# Altium PCB FPv0.1.PcbDoc
Units mm, origin at the board's own origin, x right, y up, seen from the top; angles counter-clockwise.
Board outline 81.28 x 53.34 mm, 4 copper layers (Top Layer, GROUND PLANE, MidLayer1, Bottom Layer); 97 components, 156 nets, 584 pads, 165 vias.
Unrouted connection lines stored in the file: 247.
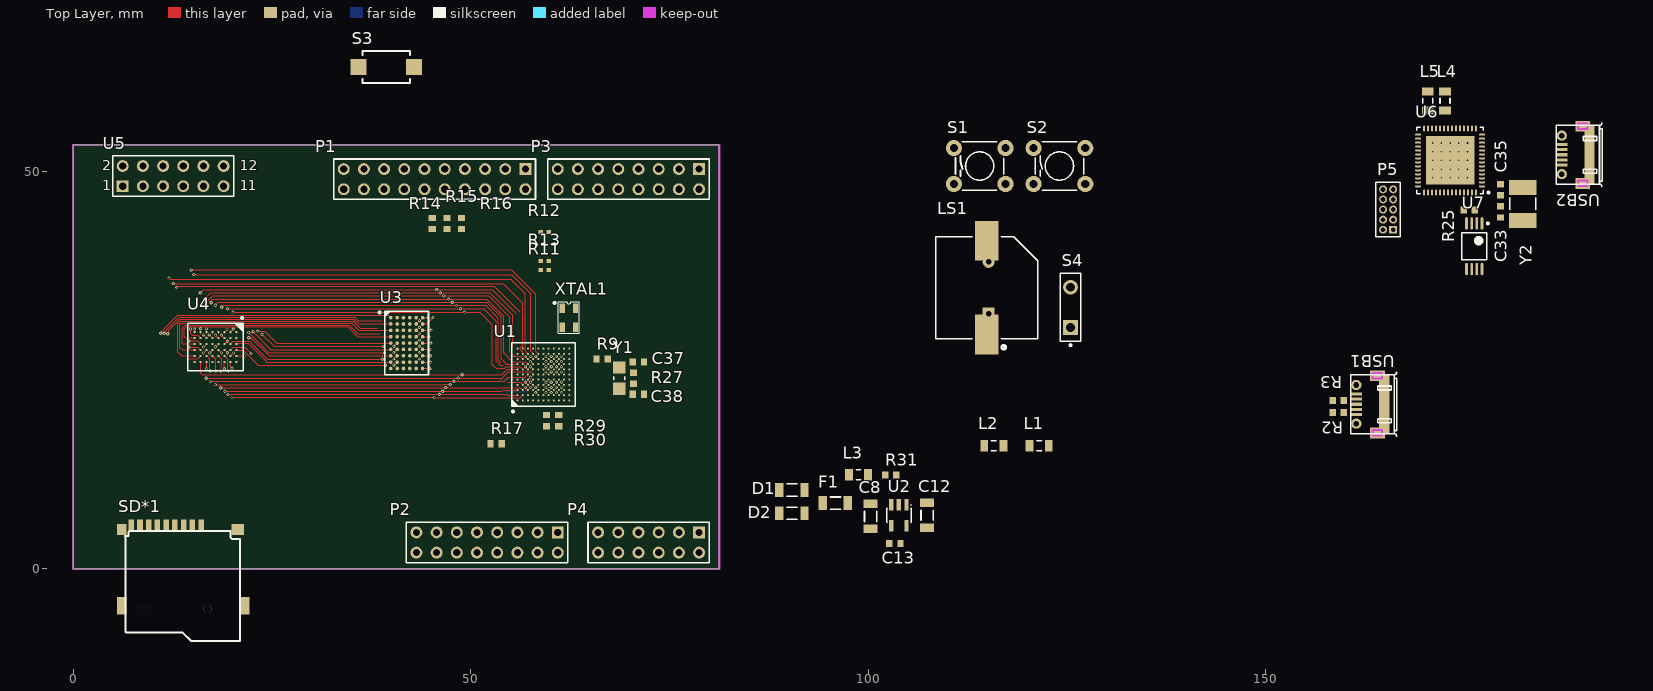
[diagram p0: Top Layer view]
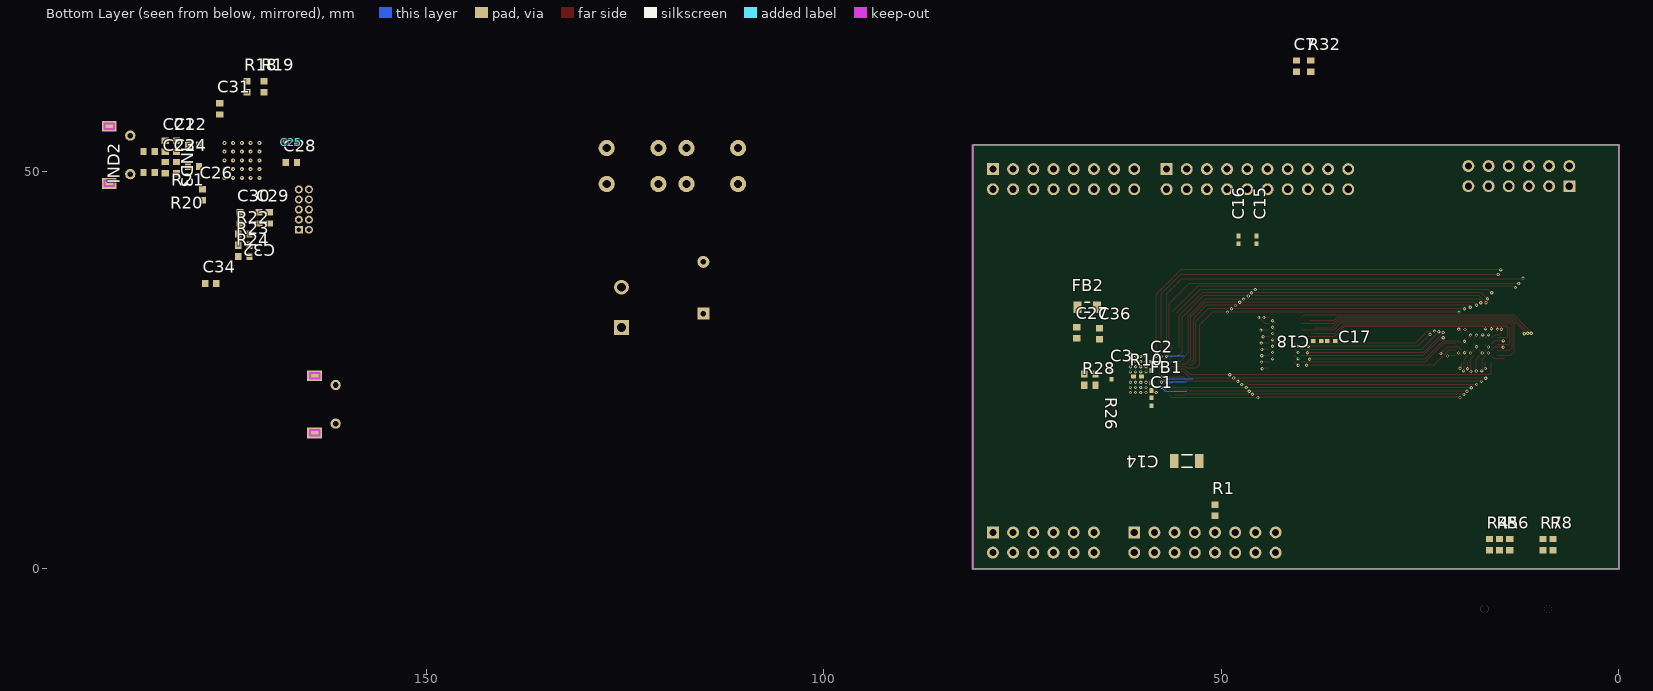
[diagram p1: Bottom Layer view, seen from below]
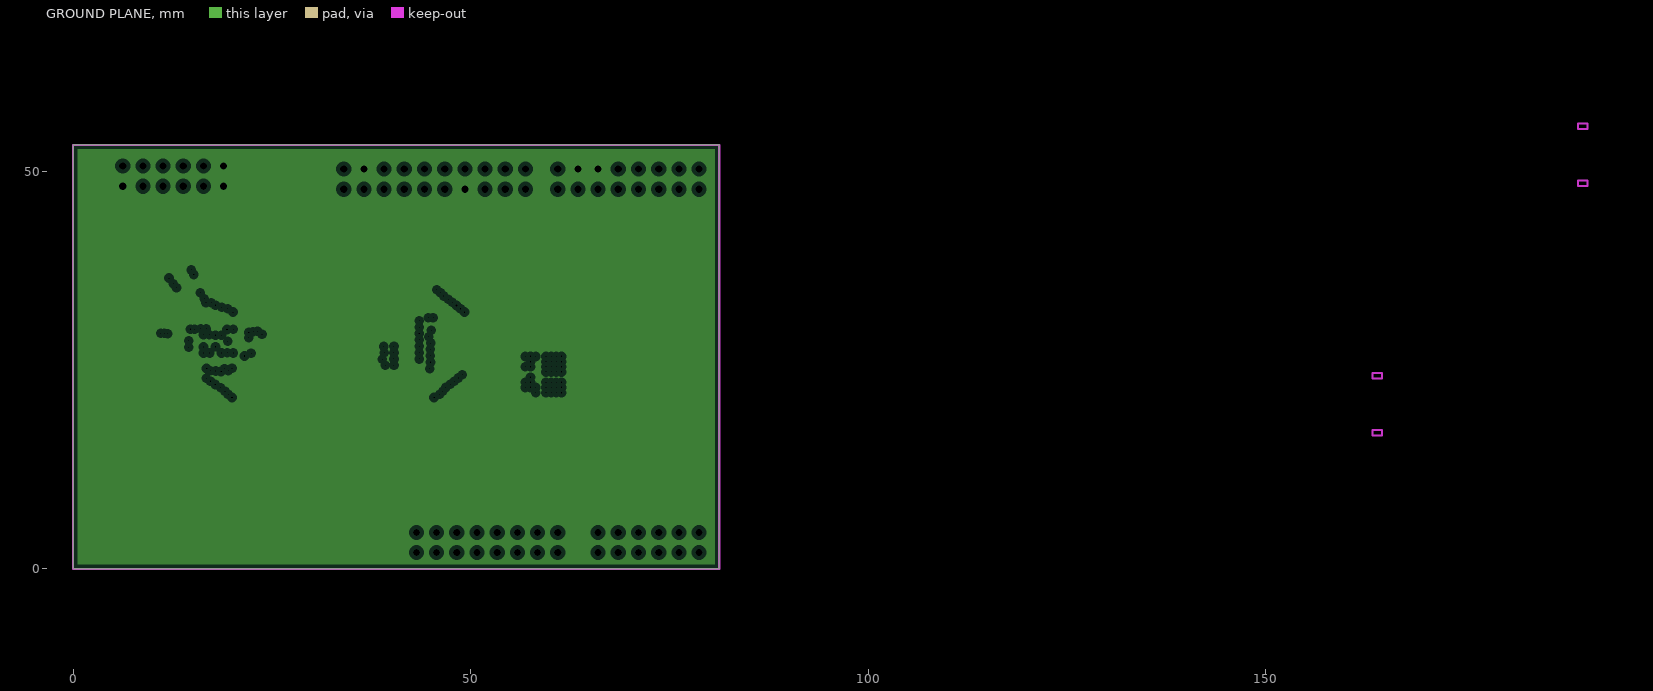
[diagram p2: GROUND PLANE, clearances drawn from the general rule]
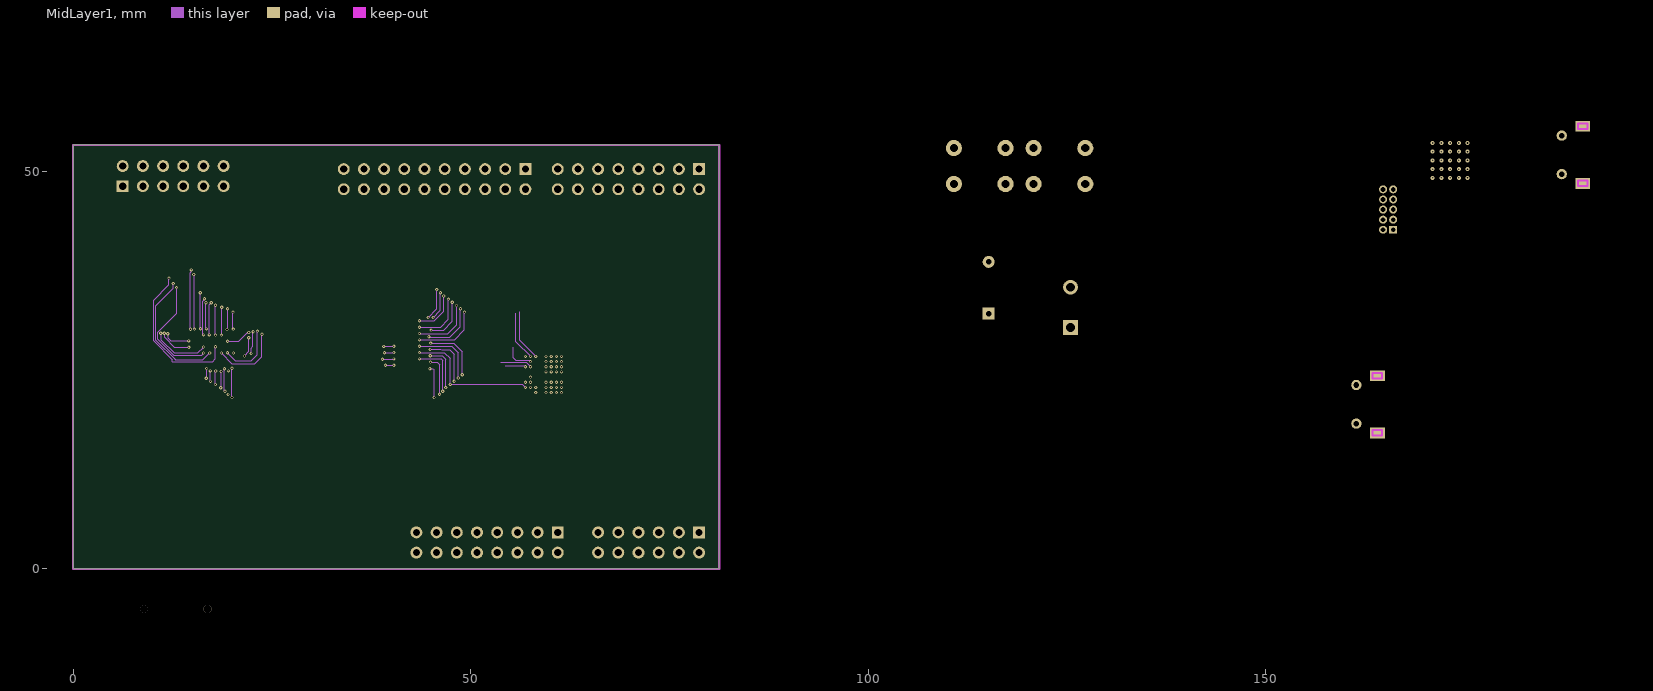
[diagram p3: MidLayer1]

## Layer stack, top to bottom
Top Layer: signal copper 0.0356
Dielectric: prepreg 0.32, FR-4, Dk 4.8
GROUND PLANE: plane copper 0.0356, net GND
Dielectric: core 0.32, FR-4, Dk 4.8
MidLayer1: signal copper 0.0356
Dielectric: prepreg 0.32, FR-4, Dk 4.8
Bottom Layer: signal copper 0.0356

## Board outline
0,0 0,53.34 81.28,53.34 81.28,0

## Design rules (kind name [scope] priority, off if disabled: settings)
Clearance [All] p1: gap=0.127
DiffPairsRouting [All] p1: maxlimit=0.254 minlimit=0.254 mostfreqgap=0.254 maxuncoupledlength=12.7
PlaneClearance [All] p1: clearance=0.508
PlaneConnect [All] p1: planeconnectstyle=Relief reliefexpansion=0.508 reliefentries=4 reliefconductorwidth=0.254 reliefairgap=0.254
PolygonConnect [All] p1: connectstyle=Relief reliefconductorwidth=0.254 reliefentries=4 polygonreliefangle="90 Angle" airgapwidth=0.254
RoutingVias [All] p1: holewidth=0.711 width=1.27 viastyle="Through Hole" minholewidth=0.711 minwidth=1.27 maxholewidth=0.711 maxwidth=1.27
SolderMaskExpansion [All] p1: expansion=0.102
Width [All] p1: maxlimit=1.778 minlimit=0.102 preferedwidth=0.254 midlayer1_maxwidth=0.254 minimp=50.000000 maximp=50.000000 favimp=50.000000
25 further rules are at their usual default settings.

## Classes and differential pairs
from-to class SRAM_DATA: "AD0 (U1-B2 : U4-B6)" "AD1 (U1-A2 : U4-C5)" "AD2 (U1-A3 : U4-C6)" "AD3 (U1-B3 : U4-D5)" "AD4 (U1-C3 : U4-E5)" "AD5 (U1-C6 : U4-F5)" "AD6 (U1-D6 : U4-F6)" "AD7 (U1-A7 : U4-G6)" "AD8 (U1-B7 : U4-B1)" "AD9 (U1-C7 : U4-C1)" "AD10 (U1-D7 : U4-C2)" "AD11 (U1-A8 : U4-D2)" "AD12 (U1-C8 : U4-E2)" "AD13 (U1-D8 : U4-F2)" "AD14 (U1-B9 : U4-F1)" "AD15 (U1-D9 : U4-G1)" "AD16 (U1-E9 : U4-F4)" "AD17 (U1-B10 : U4-E4)" "AD18 (U1-C10 : U4-D3)" "AD19 (U1-D10 : U4-H1)" "AD20 (U1-E10 : U4-G2)"
component class MCU_K64FX: C1 C2 C3 C7 C27 C36 C37 C38 FB1 FB2 P5 R4 R5 R6 R7 R8 R9 R10 R26 R27 R28 R29 R30 R32 S3 U1 XTAL1 Y1
component class Memory: C14 C15 C16 C17 C18 R11 R12 R13 R14 R15 R16 R17 U3 U4
component class power_manage: C8 C12 C13 D1 D2 F1 L3 R31 S4 U2
component class protocol1: L1 L2 LS1 P1 P2 P3 P4 R1 R2 R3 S1 S2 SD*1 USB1
component class protocol2: C21 C22 C23 C24 C25 C26 C28 C29 C30 C31 C32 C33 C34 C35 IND2 IND3 L4 L5 R18 R19 R20 R21 R22 R23 R24 R25 U6 U7 USB2 Y2
component class RF_mod: U5
net class AD[20..0]: AD0 AD1 AD2 AD3 AD4 AD5 AD6 AD7 AD8 AD9 AD10 AD11 AD12 AD13 AD14 AD15 AD16 AD17 AD18 AD19 AD20
net class PTE[0..6]: PTE0 PTE1 PTE2 PTE3 PTE4 PTE5 PTE6 PTE24 PTE25 PTE26
differential pair USB0D: +USB0D_P -USB0D_N
differential pair USB1D: +USB1D_P -USB1D_N

## Components (designator, comment, footprint, x,y, rotation, side; value= is the part's Value field where it differs from the comment)
C1 "Cap" 0402 58.78,21.013 r90 bottom
C2 "Cap" 0402 58.78,25.458 r270 bottom
C3 "Cap" 0402 63.85,24.35 r90 bottom
C7 "Cap" 1608[0603] 40.539,63.244 r270 bottom
C8 "Cap Pol1" 1206(2) 100.33,6.604 r270 top
C12 "Cap Pol1" 1206(2) 107.442,6.731 r90 top
C13 "Cap" 1608[0603] 103.378,3.175 r180 top
C14 "Cap Pol1" 1206(2) 54.348,13.572 r0 bottom
C15 "Cap" 0402 45.56,41.384 r270 bottom
C16 "Cap" 0402 47.846,41.384 r270 bottom
C17 "Cap" 0402 37.948,28.662 r0 bottom
C18 "Cap" 0402 36.17,28.662 r180 bottom
C21 "Cap Pol1" 1608[0603] 182.877,53.153 r90 bottom
C22 "Cap" 1608[0603] 181.48,53.153 r90 bottom
C23 "Cap Pol1" 1608[0603] 182.877,50.486 r90 bottom
C24 "Cap" 1608[0603] 181.48,50.486 r270 bottom
C25 "Cap" 1608[0603] 167.002,53.661 r0 bottom
C26 "Cap" 1608[0603] 178.178,47.057 r90 bottom
C27 "Cap" 1608[0603] 68.191,29.701 r90 bottom
C28 "Cap" 1608[0603] 167.002,51.121 r0 bottom
C29 "Cap" 1608[0603] 171.066,44.136 r90 bottom
C30 "Cap" 1608[0603] 173.479,44.136 r90 bottom
C31 "Cap" 1608[0603] 176.019,57.852 r270 bottom
C32 "Cap" 1608[0603] 169.796,44.136 r270 bottom
C33 "Cap" 1608[0603] 179.575,44.898 r270 top
C34 "Cap" 1608[0603] 177.162,35.881 r0 bottom
C35 "Cap" 1608[0603] 179.575,47.692 r270 top
C36 "Cap" 1608[0603] 65.351,29.584 r90 bottom
C37 "Cap" 1608[0603] 71.112,26.018 r180 top
C38 "Cap" 1608[0603] 71.112,21.954 r180 top
D1 "Diode 1N4001" 1206(2) 90.424,9.906 r0 top
D2 "Diode 1N4001" 1206(2) 90.424,6.985 r0 top
F1 "300-500mA" 1206(2) 95.885,8.255 r0 top
FB1 "Inductor" 0402 58.78,22.918 r90 bottom
FB2 "Inductor" C2012 66.875,32.886 r180 bottom
IND2 "Inductor" 1608[0603] 184.909,52.518 r0 bottom
IND3 "Inductor" 1608[0603] 184.909,49.851 r180 bottom
L1 "LED" C2012 121.539,15.494 r0 top
L2 "LED" C2012 115.824,15.494 r0 top
L3 "LED" C2012 98.806,11.811 r0 top
L4 "LED" C2012 172.59,58.868 r270 top
L5 "LED" C2012 170.431,58.868 r270 top
LS1 "Buzzer" ABSM-1574 114.935,29.464 r90 top
P1 "Header 10X2" HDR2X10 56.896,50.292 r180 top
P2 "Header 8X2" HDR2X8 60.96,4.572 r180 top
P3 "Header 8X2" HDR2X8 78.74,50.292 r180 top
P4 "Header 6X2" HDR2X6 78.74,4.572 r180 top
P5 "JTAG" MHDR2X5 166.07,42.655 r90 top
R1 "Res" 1608[0603] 50.8,7.366 r90 bottom
R2 "Res" 1608[0603] 159.154,19.649 r0 top
R3 "Res" 1608[0603] 159.154,21.173 r0 top
R4 "Res" 1608[0603] 16.256,3.048 r90 bottom
R5 "Res" 1608[0603] 14.986,3.048 r90 bottom
R6 "Res" 1608[0603] 13.716,3.048 r90 bottom
R7 "Res" 1608[0603] 9.525,3.048 r90 bottom
R8 "Res" 1608[0603] 8.255,3.048 r90 bottom
R9 "Res" 1608[0603] 66.54,26.399 r180 top
R10 "Res" 0402 60.558,24.188 r180 bottom
R11 "Res" 0402 59.325,37.574 r0 top
R12 "Res" 0402 59.325,42.4 r0 top
R13 "Res" 0402 59.325,38.717 r0 top
R14 "Res" 1608[0603] 45.164,43.442 r90 top
R15 "Res" 1608[0603] 47.005,43.442 r90 top
R16 "Res" 1608[0603] 48.847,43.442 r90 top
R17 "Res" 1608[0603] 53.205,15.731 r180 top
R18 "Res" 1608[0603] 172.59,60.646 r270 bottom
R19 "Res" 1608[0603] 170.431,60.646 r270 bottom
R20 "Res" 1608[0603] 179.321,50.613 r0 bottom
R21 "Res" 1608[0603] 179.321,53.28 r0 bottom
R22 "Res" 1608[0603] 172.971,42.104 r0 bottom
R23 "Res" 1608[0603] 172.971,40.707 r0 bottom
R24 "Res" 1608[0603] 172.971,39.31 r0 bottom
R25 "Res" 1608[0603] 175.638,45.152 r180 top
R26 "Res" 1608[0603] 66.54,24.494 r180 bottom
R27 "Res" 1608[0603] 70.477,23.986 r270 top
R28 "Res" 1608[0603] 66.54,23.097 r180 bottom
R29 "Res" 1608[0603] 59.555,18.652 r90 top
R30 "Res" 1608[0603] 61.079,18.652 r90 top
R31 "Res" 1608[0603] 102.87,11.811 r180 top
R32 "Res" 1608[0603] 38.761,63.244 r270 bottom
S1 "BUTON" TACTILE-PTH 114.046,50.673 r0 top
S2 "BUTON" TACTILE-PTH 124.079,50.673 r0 top
S3 "SW-PB" SMT_Button 39.396,63.117 r0 top
S4 "SW-SPST" SPST-2 125.476,32.893 r90 top
SD*1 "TF_card" SD_card 11.938,-3.302 r90 top
U1 "MK64FX512VDC" BGA121C65P11X11_800X800X50 59.161,24.442 r90 top
U2 "MIC5219" SOT-23-5 103.886,6.731 r180 top
U3 "SN74LVC16373A(BGA54)" BGA54C80P6X9_550X800X120 41.95,28.4 r0 top
U4 "EM7164SU16" BGA48C75P6X8_598X698X104 17.9,27.9 r270 top
U5 "MRF24J40" HDR2X6 6.223,48.133 r0 top
U6 "FT2232H-56" QFN50P800X800X90_HS-57N 173.225,51.375 r180 top
U7 "AT93C46D" TSOP65P640X120-8N-AT93C46D 176.273,40.58 r270 top
USB1 "USB_5line" USB-MICRO-5P-2F 161.44,19.395 r270 top
USB2 "USB_5line" USB-MICRO-5P-2F 187.279,50.783 r270 top
XTAL1 "有源晶体" XTAL7_3225 62.349,31.606 r270 top
Y1 "XTAL" 3215 68.699,23.986 r270 top
Y2 "12MHz" 5032 182.369,45.914 r270 top

## Footprints (in the part's own frame and the unit in brackets; to place one, negate y for a bottom-side part, rotate by r counter-clockwise, add the part's x,y. Pads: shape width x height; smd on the part's side, far side on the other; paste and mask are expansions set on the pad)
0402 [mm] "Chip Capacitor, Body 1.0x0.5mm, IPC High Density"
  rect 0.6x0.5 smd: 1(-0.5,0) 2(0.5,0)
  body extent -0.55,-0.3 0.55,0.3, height 1.3
1206(2) [mm]
  rect 1.05x1.75 smd: 1(-1.575,0) 2(1.575,0)
  silkscreen extent -0.65,-0.77 0.65,0.77, body extent -1.6,-0.8 1.6,0.8, height 1.6
1608[0603] [mm] "Chip Capacitor, Body 1.6x0.8mm, IPC High Density"
  rect 0.8x0.9 smd: 1(-0.7,0) 2(0.7,0)
  body extent -0.87,-0.48 0.87,0.48, height 1.3
3215 [mm]
  rect 1.54x1.55 smd: 1(-1.335,0) 2(1.335,0)
  silkscreen extent -0.2,-0.67 0.2,0.67, body extent -1.65,-0.75 1.65,0.75, height 0.75
5032 [mm]
  rect 1.9x3.45 smd: 1(-2.075,0) 2(2.075,0)
  silkscreen extent -0.75,-1.63 0.75,1.63, body extent -2.6,-1.7 2.6,1.7, height 1.3
ABSM-1574 [mm] "Magnetic Transducer Buzzer"
  rect 5x3 smd: 1(0,0) 2(11.8,0)
  rect 1.5x1.5 hole 0.7: 1A(2.65,-0.24)
  round 1.5 hole 0.7: 2A(9.15,-0.24)
  silkscreen extent -1.83,-6.4 12.3,6.4
BGA48C75P6X8_598X698X104 [mm] "BGA, 48-Leads, Body 5.98x6.98mmx1.04mm, Pitch 0.75mm"
  round 0.29 smd: A1(-1.875,2.625) A2(-1.125,2.625) A3(-0.375,2.625) A4(0.375,2.625) A5(1.125,2.625) A6(1.875,2.625) B1(-1.875,1.875) B2(-1.125,1.875) B3(-0.375,1.875) B4(0.375,1.875) B5(1.125,1.875) B6(1.875,1.875) C1(-1.875,1.125) C2(-1.125,1.125) C3(-0.375,1.125) C4(0.375,1.125) C5(1.125,1.125) C6(1.875,1.125) D1(-1.875,0.375) D2(-1.125,0.375) D3(-0.375,0.375) D4(0.375,0.375) D5(1.125,0.375) D6(1.875,0.375) E1(-1.875,-0.375) E2(-1.125,-0.375) E3(-0.375,-0.375) E4(0.375,-0.375) E5(1.125,-0.375) E6(1.875,-0.375) F1(-1.875,-1.125) F2(-1.125,-1.125) F3(-0.375,-1.125) F4(0.375,-1.125) F5(1.125,-1.125) F6(1.875,-1.125) G1(-1.875,-1.875) G2(-1.125,-1.875) G3(-0.375,-1.875) G4(0.375,-1.875) G5(1.125,-1.875) G6(1.875,-1.875) H1(-1.875,-2.625) H2(-1.125,-2.625) H3(-0.375,-2.625) H4(0.375,-2.625) H5(1.125,-2.625) H6(1.875,-2.625)
  silkscreen extent -3.77,-3.5 3,3.5, body extent -2.99,-3.49 2.99,3.49, height 1.04
BGA54C80P6X9_550X800X120 [mm] "BGA, 54-Leads, Body 5.50x8.00mmx1.20mm, Pitch 0.80mm"
  round 0.45 smd: A1(-2,3.2) A2(-1.2,3.2) A3(-0.4,3.2) A4(0.4,3.2) A5(1.2,3.2) A6(2,3.2) B1(-2,2.4) B2(-1.2,2.4) B3(-0.4,2.4) B4(0.4,2.4) B5(1.2,2.4) B6(2,2.4) C1(-2,1.6) C2(-1.2,1.6) C3(-0.4,1.6) C4(0.4,1.6) C5(1.2,1.6) C6(2,1.6) D1(-2,0.8) D2(-1.2,0.8) D3(-0.4,0.8) D4(0.4,0.8) D5(1.2,0.8) D6(2,0.8) E1(-2,0) E2(-1.2,0) E3(-0.4,0) E4(0.4,0) E5(1.2,0) E6(2,0) F1(-2,-0.8) F2(-1.2,-0.8) F3(-0.4,-0.8) F4(0.4,-0.8) F5(1.2,-0.8) F6(2,-0.8) G1(-2,-1.6) G2(-1.2,-1.6) G3(-0.4,-1.6) G4(0.4,-1.6) G5(1.2,-1.6) G6(2,-1.6) H1(-2,-2.4) H2(-1.2,-2.4) H3(-0.4,-2.4) H4(0.4,-2.4) H5(1.2,-2.4) H6(2,-2.4) J1(-2,-3.2) J2(-1.2,-3.2) J3(-0.4,-3.2) J4(0.4,-3.2) J5(1.2,-3.2) J6(2,-3.2)
  silkscreen extent -3.52,-4 2.75,4, body extent -2.75,-4 2.75,4, height 1.2
BGA121C65P11X11_800X800X50 [mm] "BGA, 121-Leads, Body 8.00x8.00mmx0.50mm, Pitch 0.65mm"
  round 0.25 smd: A1(-3.25,3.25) A2(-2.6,3.25) A3(-1.95,3.25) A4(-1.3,3.25) A5(-0.65,3.25) A6(0,3.25) A7(0.65,3.25) A8(1.3,3.25) A9(1.95,3.25) A10(2.6,3.25) A11(3.25,3.25) B1(-3.25,2.6) B2(-2.6,2.6) B3(-1.95,2.6) B4(-1.3,2.6) B5(-0.65,2.6) B6(0,2.6) B7(0.65,2.6) B8(1.3,2.6) B9(1.95,2.6) B10(2.6,2.6) B11(3.25,2.6) C1(-3.25,1.95) C2(-2.6,1.95) C3(-1.95,1.95) C4(-1.3,1.95) C5(-0.65,1.95) C6(0,1.95) C7(0.65,1.95) C8(1.3,1.95) C9(1.95,1.95) C10(2.6,1.95) C11(3.25,1.95) D1(-3.25,1.3) D2(-2.6,1.3) D3(-1.95,1.3) D4(-1.3,1.3) D5(-0.65,1.3) D6(0,1.3) D7(0.65,1.3) D8(1.3,1.3) D9(1.95,1.3) D10(2.6,1.3) D11(3.25,1.3) E1(-3.25,0.65) E2(-2.6,0.65) E3(-1.95,0.65) E4(-1.3,0.65) E5(-0.65,0.65) E6(0,0.65) E7(0.65,0.65) E8(1.3,0.65) E9(1.95,0.65) E10(2.6,0.65) E11(3.25,0.65) F1(-3.25,0) F2(-2.6,0) F3(-1.95,0) F4(-1.3,0) F5(-0.65,0) F6(0,0) F7(0.65,0) F8(1.3,0) F9(1.95,0) F10(2.6,0) F11(3.25,0) G1(-3.25,-0.65) G2(-2.6,-0.65) G3(-1.95,-0.65) G4(-1.3,-0.65) G5(-0.65,-0.65) G6(0,-0.65) G7(0.65,-0.65) G8(1.3,-0.65) G9(1.95,-0.65) G10(2.6,-0.65) G11(3.25,-0.65) H1(-3.25,-1.3) H2(-2.6,-1.3) H3(-1.95,-1.3) H4(-1.3,-1.3) H5(-0.65,-1.3) H6(0,-1.3) H7(0.65,-1.3) H8(1.3,-1.3) H9(1.95,-1.3) H10(2.6,-1.3) H11(3.25,-1.3) J1(-3.25,-1.95) J2(-2.6,-1.95) J3(-1.95,-1.95) J4(-1.3,-1.95) J5(-0.65,-1.95) J6(0,-1.95) J7(0.65,-1.95) J8(1.3,-1.95) J9(1.95,-1.95) J10(2.6,-1.95) J11(3.25,-1.95) K1(-3.25,-2.6) K2(-2.6,-2.6) K3(-1.95,-2.6) K4(-1.3,-2.6) K5(-0.65,-2.6) K6(0,-2.6) K7(0.65,-2.6) K8(1.3,-2.6) K9(1.95,-2.6) K10(2.6,-2.6) K11(3.25,-2.6) L1(-3.25,-3.25) L2(-2.6,-3.25) L3(-1.95,-3.25) L4(-1.3,-3.25) L5(-0.65,-3.25) L6(0,-3.25) L7(0.65,-3.25) L8(1.3,-3.25) L9(1.95,-3.25) L10(2.6,-3.25) L11(3.25,-3.25)
  silkscreen extent -4.77,-4 4,4, body extent -4,-4 4,4, height 0.5
C2012 [mm] "Chip Capacitor, 2-Leads, Body 2.0x1.2mm, IPC Low Density"
  rect 1x1.45 smd: 1(-1.2,0) 2(1.2,0)
  silkscreen extent -0.3,-0.63 0.3,0.63, body extent -0.98,-0.6 1.02,0.6, height 0.5
HDR2X6 [mm] "Connector; Header; 6x2 Position"
  rect 1.5x1.5 hole 0.9: 1(0,0)
  round 1.5 hole 0.9: 2(0,2.54) 3(2.54,0) 4(2.54,2.54) 5(5.08,0) 6(5.08,2.54) 7(7.62,0) 8(7.62,2.54) 9(10.16,0) 10(10.16,2.54) 11(12.7,0) 12(12.7,2.54)
  silkscreen extent -1.27,-1.27 13.97,3.81, body extent -1.27,-1.27 13.97,3.81, height 7.58
HDR2X8 [mm] "Connector; Header; 8x2 Position"
  rect 1.5x1.5 hole 0.9: 1(0,0)
  round 1.5 hole 0.9: 2(0,2.54) 3(2.54,0) 4(2.54,2.54) 5(5.08,0) 6(5.08,2.54) 7(7.62,0) 8(7.62,2.54) 9(10.16,0) 10(10.16,2.54) 11(12.7,0) 12(12.7,2.54) 13(15.24,0) 14(15.24,2.54) 15(17.78,0) 16(17.78,2.54)
  silkscreen extent -1.27,-1.27 19.05,3.81, body extent -1.27,-1.27 19.05,3.81, height 7.58
HDR2X10 [mm] "Connector; Header; 10x2 Position"
  rect 1.5x1.5 hole 0.9: 1(0,0)
  round 1.5 hole 0.9: 2(0,2.54) 3(2.54,0) 4(2.54,2.54) 5(5.08,0) 6(5.08,2.54) 7(7.62,0) 8(7.62,2.54) 9(10.16,0) 10(10.16,2.54) 11(12.7,0) 12(12.7,2.54) 13(15.24,0) 14(15.24,2.54) 15(17.78,0) 16(17.78,2.54) 17(20.32,0) 18(20.32,2.54) 19(22.86,0) 20(22.86,2.54)
  silkscreen extent -1.27,-1.27 24.13,3.81, body extent -1.27,-1.27 24.13,3.81, height 7.58
MHDR2X5 [mm] "Connector; Header; 5x2 Position"
  rect 1x1 hole 0.6: 1(0,0)
  round 1 hole 0.6: 2(0,1.27) 3(1.27,0) 4(1.27,1.27) 5(2.54,0) 6(2.54,1.27) 7(3.81,0) 8(3.81,1.27) 9(5.08,0) 10(5.08,1.27)
  silkscreen extent -0.9,-0.9 5.98,2.17
QFN50P800X800X90_HS-57N [mm] "QFN, 56-Leads, Body 8.00x8.00mm, Pitch 0.50mm, Thermal Pad 6.10x6.10mm, IPC Medium Density"
  oval 0.75x0.25 smd: 1(-4.025,3.25) 2(-4.025,2.75) 3(-4.025,2.25) 4(-4.025,1.75) 5(-4.025,1.25) 6(-4.025,0.75) 7(-4.025,0.25) 8(-4.025,-0.25) 9(-4.025,-0.75) 10(-4.025,-1.25) 11(-4.025,-1.75) 12(-4.025,-2.25) 13(-4.025,-2.75) 14(-4.025,-3.25) 29(4.025,-3.25) 30(4.025,-2.75) 31(4.025,-2.25) 32(4.025,-1.75) 33(4.025,-1.25) 34(4.025,-0.75) 35(4.025,-0.25) 36(4.025,0.25) 37(4.025,0.75) 38(4.025,1.25) 39(4.025,1.75) 40(4.025,2.25) 41(4.025,2.75) 42(4.025,3.25)
  oval 0.25x0.75 smd: 15(-3.25,-4.025) 16(-2.75,-4.025) 17(-2.25,-4.025) 18(-1.75,-4.025) 19(-1.25,-4.025) 20(-0.75,-4.025) 21(-0.25,-4.025) 22(0.25,-4.025) 23(0.75,-4.025) 24(1.25,-4.025) 25(1.75,-4.025) 26(2.25,-4.025) 27(2.75,-4.025) 28(3.25,-4.025) 43(3.25,4.025) 44(2.75,4.025) 45(2.25,4.025) 46(1.75,4.025) 47(1.25,4.025) 48(0.75,4.025) 49(0.25,4.025) 50(-0.25,4.025) 51(-0.75,4.025) 52(-1.25,4.025) 53(-1.75,4.025) 54(-2.25,4.025) 55(-2.75,4.025) 56(-3.25,4.025)
  rect 6.1x6.1 smd: 57(0,0)
  silkscreen extent -4.97,-4.19 4.19,4.19, body extent -4.04,-4.04 4.04,4.04, height 0.9
SD_card [mm]
  rect 1.6x0.7 smd: 1(8.732,-4.16) 2(8.732,-3.06) 3(8.732,-1.96) 4(8.732,-0.86) 5(8.732,0.24) 6(8.732,1.34) 7(8.732,2.44) 8(8.732,3.54) 9(8.732,4.64)
  rect 1.4x1.2 smd: 10(8.232,5.84)
  rect 2.2x1.2 smd: 11(-1.368,5.84) 12(-1.368,-9.66)
  rect 1.4x1.6 smd: 13(8.232,-8.76)
  silkscreen extent -5.79,-9.04 8.03,5.43
SMT_Button [mil]
  rect 80x80 smd: 1(-137.8,0) 2(137.8,0)
  silkscreen extent -118,-79 118,79
SOT-23-5 [mm] "SOT-23/SC-74A; 5 Leads; Body 3.1 x 3 mm, inc. leads (LxW max)"
  rect 0.55x1.45 smd: 1(-0.95,-1.329) 2(0,-1.329) 3(0.95,-1.329) 4(0.95,1.329) 5(-0.95,1.329)
  silkscreen extent -1.57,-1.35 1.55,0.9
SPST-2 [mm] "Switch; 2 Leads"
  rect 1.85x1.85 hole 1.1: 1(-2.54,0)
  round 1.85 hole 1.1: 2(2.54,0)
  silkscreen extent -4.89,-1.27 4.28,1.27
TACTILE-PTH [mil] "直插按钮"
  round 80 hole 40: 1(-128,89) 2(128,89) 3(-128,-89) 4(128,-89)
  silkscreen extent -120,-120 120,120, body extent -162,-118 162,118, height 213
TSOP65P640X120-8N-AT93C46D [mm] "TSOP, 8-Leads, Body 3.00x4.40mm, Pitch 0.65mm, IPC Medium Density"
  oval 1.55x0.35 smd: 1(-2.875,0.975) 2(-2.875,0.325) 3(-2.875,-0.325) 4(-2.875,-0.975) 5(2.875,-0.975) 6(2.875,-0.325) 7(2.875,0.325) 8(2.875,0.975)
  silkscreen extent -3,-1.55 1.7,1.83, body extent -2.25,-1.55 2.25,1.55, height 1.2
USB-MICRO-5P-2F [mm]
  round 1.3 hole 0.7: 0(-3.725,0) 0(1.125,0)
  rect 0.4x1.4 smd: 1(0,0) 2(-0.65,0) 3(-1.3,0) 4(-1.95,0) 5(-2.6,0)
  rect 1.35x1.85 all layers, no hole: 6(2.3,2.65) 7(-4.9,2.65)
  rect 7.35x1.3 smd: 8(-1.3,3.5)
  Keep-Out Layer lines w0.254: 2.65,2.05 2.65,3.25 1.95,3.25 1.95,2.05 2.65,2.05 ; -4.55,2.05 -5.25,2.05 -5.25,3.25 -4.55,3.25 -4.55,2.05
  silkscreen extent -5.3,-0.7 2.7,5.1
XTAL7_3225 [mil]
  rect 47.2x25.6 smd: 1(-47.25,-32.5) 2(47.25,-32.5) 3(47.25,32.5) 4(-47.25,32.5)
  silkscreen extent -79,-75 79,53

## Part data
C1 C2 C3 C7 C13 C15 C16 C17 C18 C22 C24 C25 C26 C27 C28 C29 C30 C31 C32 C33 C34 C35 C36 C37 C38: "贴片电容"
C8 C12 C14 C21 C23: "Polarized Capacitor (Radial)"
D1 D2: "1 Amp General Purpose Rectifier"
F1: library part "Fuse 1", "Fuse"
LS1: "Magnetic Transducer Buzzer"
P1: "Header, 10-Pin, Dual row"
P2 P3: "Header, 8-Pin, Dual row"
P4: "Header, 6-Pin, Dual row"
P5: library part "Header 5X2", "Header, 5-Pin, Dual row"
R1 R2 R3 R4 R5 R6 R7 R8 R9 R10 R11 R12 R13 R14 R15 R16 R17 R18 R19 R20 R21 R22 R23 R24 R25 R26 R27 R28 R29 R30 R31 R32: "贴片电阻"
S3: "Switch"
S4: "Single-Pole, Single-Throw Switch"
U2: "LDO"
Y1: "晶体振荡器"
Y2: library part XTAL, "晶体振荡器"

## Via types
v1: diameter 0.403, hole 0.2, Top Layer to Bottom Layer, tented both sides, 137 vias
v2: diameter 0.5, hole 0.2, Top Layer to Bottom Layer, 25 vias
v3: diameter 1, hole 1, Top Layer to Bottom Layer, 2 vias
v4: diameter 0.4, hole 0.2, Top Layer to Bottom Layer, tented both sides, 1 vias

## Nets (pads, with @x,y where several pads share a name; then routed paths per layer and width w, separated by ;. In a path a pad name is that pad's centre, name@x,y a point inside that pad or via, vN(x,y) a via of type N, cw(c..) or ccw(c..) an arc to the next point about the centre after c; other vN are vias at no path point)
1.8V: C25.2 C26.2 C32.1 U6.2 U6.31 U6.43
3.3V: C1.2 C2.2 C3.2 C12.1 C14.1 C15.2 C16.2 C17.2 C18.2 C27.2 C28.2 C29.2 C30.2 C31.2 C34.2 FB1.1 FB2.1 IND2.1 IND3.1 P3.3 P3.7 P5.1 R4.1 R5.1 R6.1 R7.1 R8.1 R9.1 R14.2 R15.2 R16.2 R18.2 R19.2 R21.2 R22.1 R23.1 R24.1 R32.1 SD*1.4 U1.E5 U1.E6 U1.E7 U1.K6 U1.L10 U2.5 U3.C3 U3.C4 U3.G3 U3.G4 U4.A6 U4.D6 U4.E1 U5.10 U6.16 U6.36 U6.44 U6.50 U7.6 U7.8
5V: C8.1 F1.2 L3.1 P3.9 U2.1 U2.3
50MHZ: U1.L11 XTAL1.3
AD0: U1.B2 U3.J6 U4.B6 | length 46.2
  Top Layer w0.127: U4.B6 19.775,25.425 v1(19.975,25.225) ; v1(19.975,21.55) v1(45.4,21.55) 45.425,21.525 56.244,21.525 U1.B2 ; U3.J6 v1@44.85,25.2
  MidLayer1 w0.127: v1(19.975,21.55) v1(19.975,25.225) ; v1(44.875,25.175) 45.25,25.175 45.4,25.025 v1(45.4,21.55)
AD1: U1.A2 U3.H6 U4.C5 | length 44.6
  Top Layer w0.127: U4.C5 19.437,26.362 19.439,26.361 19.439,24.988 v1(19.526,24.901) ; v1(19.483,21.942) 54.575,21.942 54.675,21.842 U1.A2 ; U3.H6 v1(44.95,26)
  MidLayer1 w0.127: v1(44.95,26) 45.775,26 46.1,25.675 v1(46.1,21.95)
AD2: U1.A3 U3.H5 U4.C6 | length 47.4
  Top Layer w0.127: v1(19.025,25.175) U4.C6 ; v1(19.091,22.334) 19.099,22.342 v1(46.5,22.342) 53.909,22.342 53.917,22.334 54.075,22.492 U1.A3
  MidLayer1 w0.127: v1@19.025,22.4 v1(19.025,25.175) ; v1(43.55,26.4) 46.275,26.4 46.483,26.192 46.483,22.359 v1(46.5,22.342)
AD3: U1.B3 U3.G6 U4.D5 | length 48.9
  Top Layer w0.127: U4.D5 18.689,26.361 18.689,25.886 18.633,25.829 v1@18.633,25.013 ; v1@18.583,22.808 56.245,22.808 U1.B3 ; U3.G6 v1(44.925,26.8) v1@44.95,26.8
  MidLayer1 w0.127: v1(18.601,24.826) v1@18.633,24.858 ; v1@18.633,22.858 v1@18.633,24.858 ; v1@18.7,24.945 18.7,24.925 v1@18.633,24.858 ; v1(44.925,26.8) 46.425,26.8 46.875,26.35 v1(46.875,22.8)
  other v1: 18.558,22.783
AD4: U1.C3 U3.G5 U4.E5 | length 50.8
  Top Layer w0.127: U4.E5 17.939,26.361 v1(17.939,24.886) ; v1(17.883,23.183) 46.583,23.183 46.6,23.2 v1(47.425,23.2) ; v1(56.886,22.817) U1.C3
  MidLayer1 w0.127: v1(17.883,23.183) v1@17.883,24.886 ; v1(43.55,27.2) 46.7,27.2 47.425,26.475 v1(47.425,23.2) ; v1(47.425,23.2) 56.503,23.2 v1(56.886,22.817)
AD5: U1.C6 U3.F6 U4.F5 | length 53.5
  Top Layer w0.127: U4.F5 17.189,26.361 17.189,24.961 17.249,24.901 v1(17.251,24.901) ; v1(17.275,23.575) 45.825,23.575 45.85,23.6 ; U3.F6 v1(44.9,27.6) ; 45.827,23.6 45.85,23.6 ; v1(47.925,23.6) 45.85,23.6 ; U1.C6 56.895,24.126 54.726,24.126 54.2,23.6 45.85,23.6
  MidLayer1 w0.127: v1(17.251,24.901) 17.251,23.599 v1(17.275,23.575) ; v1(44.9,27.6) 46.2,27.6 46.25,27.65 46.35,27.55 47.375,27.55 47.925,27 v1(47.925,23.6)
AD6: U1.D6 U3.F5 U4.F6 | length 54.7
  Top Layer w0.127: v1(16.725,23.975) 16.742,23.992 48.087,23.992 ; v1(16.775,25.2) U4.F6 ; 45.493,23.993 v1@48.443,23.993 ; v1@48.425,23.975 v1@48.443,23.993 ; v1(48.45,24) v1@48.443,23.993 ; U1.D6 57.536,24.767 54.708,24.767 53.934,23.993 v1@48.443,23.993
  MidLayer1 w0.127: v1@16.775,24.025 v1(16.775,25.2) ; v1(43.55,28) 47.65,28 48.45,27.2 v1(48.45,24)
AD7: U1.A7 U3.E6 U4.G6 | length 50
  Top Layer w0.127: U4.G6 16.025,24.6 16.225,24.4 44.85,24.4 ; U3.E6 v1@44.925,28.4 ; 44.9,24.4 v1(48.95,24.4) 53.9,24.4 54.592,25.092 U1.A7
  MidLayer1 w0.127: v1(44.975,28.4) 47.875,28.4 48.95,27.325 v1(48.95,24.4)
AD8: U1.B7 U3.E5 U4.B1 | length 54.2
  Top Layer w0.127: U4.B1 19.775,29.8 v1(20.125,30.15) ; v1(20.1,32.3) v1(49.225,32.3) 51.15,32.3 52.75,30.7 52.75,25.7 53.2,25.25 54.3,25.25 54.475,25.425 56.228,25.425 U1.B7 ; U3.E5 v1(43.55,28.8)
  MidLayer1 w0.127: v1(20.1,32.3) 20.1,30.175 v1(20.125,30.15) ; v1(43.55,28.8) 47.975,28.8 49.225,30.05 v1(49.225,32.3)
AD9: U1.C7 U3.D6 U4.C1 | length 54.5
  Top Layer w0.127: U4.C1 v1(19.35,30.1) ; v1(19.425,32.725) v1(48.725,32.725) 51.625,32.725 53.2,31.15 53.2,26.15 53.725,25.625 54.111,25.625 ; U3.D6 v1(44.75,29.2) v1@44.9,29.2 ; v1(56.886,25.417) U1.C7
  MidLayer1 w0.127: v1(19.35,30.1) 19.425,30.175 v1(19.425,32.725) ; v1(44.75,29.2) 44.8,29.15 47.4,29.15 48.725,30.475 v1(48.725,32.725) ; 54.35,25.575 56.728,25.575 v1(56.886,25.417)
AD10: U1.D7 U3.D5 U4.C2 | length 57.8
  Top Layer w0.127: v1(18.65,29.4) U4.C2 ; v1@18.65,32.975 18.8,33.125 v1(48.225,33.125) 51.875,33.125 53.475,31.525 53.475,26.292 53.796,25.971 ; U3.D5 v1(43.55,29.6) ; v1(57.536,25.417) U1.D7
  MidLayer1 w0.127: v1@18.675,29.425 v1(18.675,32.9) ; v1(43.55,29.6) 47.1,29.6 48.225,30.725 v1(48.225,33.125) ; 53.787,25.963 56.99,25.963 v1(57.536,25.417)
AD11: U1.A8 U3.C6 U4.D2 | length 55.3
  Top Layer w0.127: v1(17.9,29.4) U4.D2 ; v1@17.9,33.2 18.225,33.525 v1(47.7,33.525) 52.025,33.525 53.825,31.725 53.825,26.425 54.508,25.742 U1.A8 ; U3.C6 v1@45.009,30
  MidLayer1 w0.127: v1(17.9,29.4) v1(17.9,33.15) ; v1(45.025,30.025) 46.6,30.025 47.7,31.125 v1(47.7,33.525)
AD12: U1.C8 U3.C5 U4.E2 | length 58.3
  Top Layer w0.127: v1(17.125,29.425) U4.E2 ; 17.125,33.525 17.525,33.925 v1(47.2,33.925) 52.025,33.925 54.15,31.8 54.15,27.15 55.225,26.075 56.878,26.075 U1.C8 ; U3.C5 v1(43.55,30.4)
  MidLayer1 w0.127: v1(17.125,29.425) 17.125,33.225 v1(17.375,33.475) ; v1(43.55,30.4) 43.567,30.417 46.242,30.417 47.2,31.375 v1(47.2,33.925)
AD13: U1.D8 U3.B6 U4.F2 | length 59.1
  Top Layer w0.127: 16.375,33.775 17.325,34.725 v1(46.2,34.725) 52.425,34.725 55.275,31.875 55.275,27.9 ; v1(16.4,29.425) 16.775,29.05 U4.F2 ; U3.B6 44.5,30.8 v1@45.325,31.625 ; v1(57.536,26.067) U1.D8
  MidLayer1 w0.127: v1(16.4,29.425) 16.308,29.517 16.308,33.637 16.5,33.83 v1(16.5,33.975) ; v1(45.275,31.6) 46.2,32.525 v1(46.2,34.725) ; 55.275,27.875 55.275,26.625 55.65,26.25 57.353,26.25 v1(57.536,26.067)
AD14: U1.B9 U3.B5 U4.F1 | length 55.3
  Top Layer w0.127: v1@16.775,33.575 17.525,34.325 v1(46.625,34.325) 52.25,34.325 54.925,31.65 54.925,27.275 55.475,26.725 56.228,26.725 U1.B9 ; U3.B5 v1(43.55,31.2)
  MidLayer1 w0.127: v1(16.7,33.475) 16.7,30.225 v1(16.75,30.175) ; v1(43.55,31.2) 45.45,31.2 46.625,32.375 v1(46.625,34.325)
AD15: U1.D9 U3.A6 U4.G1 | length 57
  Top Layer w0.127: v1@16.025,34.75 16.4,35.125 v1(45.75,35.125) 52.75,35.125 55.7,32.175 ; U3.A6 v1(44.65,31.6) ; v1(57.536,26.717) U1.D9
  MidLayer1 w0.127: v1(15.975,34.725) 15.975,30.25 v1(16.025,30.2) ; v1(44.65,31.6) 45.75,32.7 v1(45.75,35.125) ; 55.7,32.175 55.7,28.553 v1(57.536,26.717)
AD16: U1.E9 U4.F4 | length 66.2
  Top Layer w0.127: v1(13,35.375) 13.15,35.525 52.975,35.525 56.15,32.35 ; v1(16.4,27.15) U4.F4 ; v1(58.186,26.717) U1.E9
  MidLayer1 w0.127: v1(13,35.375) 13,32.155 10.633,29.787 10.633,28.883 12.62,26.896 16.146,26.896 v1(16.4,27.15) ; 56.15,32.35 56.15,28.753 v1(58.186,26.717)
AD17: U1.B10 U4.E4 | length 68.5
  Top Layer w0.127: v1(12.575,35.875) 54.075,35.875 56.561,33.389 56.561,28.008 56.43,28.008 56.245,27.823 56.245,27.561 56.43,27.376 56.561,27.376 U1.B10 ; v1(17.175,27.15) 17.525,27.5 U4.E4
  MidLayer1 w0.127: v1(12.575,35.875) 12.575,35.309 10.379,33.113 10.379,28.778 12.821,26.336 12.821,26.279 16.304,26.279 v1(17.175,27.15)
AD18: U1.C10 U4.D3 | length 73.1
  Top Layer w0.127: 12.2,36.425 55.071,36.425 56.9,34.596 56.9,27.832 56.895,27.827 56.895,27.358 U1.C10 ; v1(17.9,27.925) 18.25,28.275 U4.D3
  MidLayer1 w0.127: v1(12.05,36.575) 12.05,35.709 10.125,33.784 10.125,28.672 12.475,26.322 12.475,26.025 17.525,26.025 17.9,26.4 v1(17.9,27.925)
AD19: U1.D10 U4.H1 | length 58.2
  Top Layer w0.127: v1@15.175,37 55.175,37 57.545,34.63 57.545,27.358 U1.D10 ; U4.H1 v1@15.275,30.125
  MidLayer1 w0.127: v1(15.25,30.15) v1@15.25,36.95
  other v1: 15.175,37.025
AD20: U1.E10 U4.G2 | length 61.7
  Top Layer w0.127: v1@14.775,30.075 14.775,29.65 15.025,29.4 15.65,29.4 U4.G2 ; v1(14.85,37.6) 55.125,37.6 58.175,34.55 58.175,27.826 58.177,27.824 58.177,27.38 58.175,27.378 U1.E10
  MidLayer1 w0.127: v1(14.75,30.125) 14.75,37.275 14.85,37.375 v1(14.85,37.6)
ADC0_DM0/ADC1_DM3: P1.13
ADC0_DM1: P4.4
ADC0_DP0/ADC1_DP3: P1.15
ADC0_DP1: P4.2
ADC1_DM0/ADC0_DM3: P1.7
ADC1_DM1: P4.8
ADC1_DP0/ADC0_DP3: P1.9
ADC1_DP1: P4.6
ADC1_SE18: P1.3
ADDR0: U3.J1
ADDR1: U3.H1 U4.A3 | length 20.5
  Top Layer w0.127: U4.A3 20.617,28.367 21.733,28.367 22.008,28.367 24.392,25.983 39.063,25.983 39.095,26.015 39.935,26.015 U3.H1
ADDR2: U3.H2 U4.A4 | length 21.2
  Top Layer w0.102: v1(39.275,25.595) v1@39.302,25.623
  Top Layer w0.127: U4.A4 21.4,27.525 21.983,26.942 21.983,26.938 23.298,25.623 23.573,25.623 v1@39.302,25.623 ; v1(40.35,25.6) U3.H2
  MidLayer1 w0.127: v1(39.275,25.595) 39.302,25.623 39.3,25.625 v1@40.325,25.625
ADDR3: U3.G1 U4.A5 | length 22.4
  Top Layer w0.127: U4.A5 v1(21.55,26.775) ; v1(22.075,29.075) 22.35,29.075 24.642,26.783 39.933,26.783 U3.G1
  MidLayer1 w0.127: v1(21.55,26.775) 21.55,26.83 22.075,27.355 v1(22.075,29.075)
ADDR4: U3.G2 U4.B3 | length 22.2
  Top Layer w0.127: U4.B3 20.15,28.65 21.875,28.65 22.15,28.65 24.425,26.375 v1(38.901,26.375) ; v1(40.35,26.4) U3.G2
  MidLayer1 w0.127: v1(38.901,26.375) 40.325,26.375 v1(40.35,26.4)
ADDR5: U3.F1 U4.B4 | length 24.2
  Top Layer w0.127: U4.B4 20.125,27.875 21.6,27.875 v1(22.375,27.1) ; v1(22.626,29.826) 24.87,27.583 39.933,27.583 U3.F1
  MidLayer1 w0.127: v1(22.375,27.1) 22.375,27.775 22.575,27.975 v1@22.575,29.8 ; v1@22.575,29.878 v1(22.626,29.826)
ADDR6: U3.F2 U4.C3 | length 23.6
  Top Layer w0.127: U4.C3 19.075,28.275 v1(19.425,28.625) ; v1(22.075,29.725) 24.625,27.175 v1(39.15,27.175) ; v1(40.35,27.2) U3.F2
  MidLayer1 w0.127: v1(19.425,28.625) 20.825,28.625 21.925,29.725 v1(22.075,29.725) ; v1(39.15,27.175) 39.821,27.175 39.846,27.2 v1(40.35,27.2)
ADDR7: U3.E1 U4.C4 | length 25.4
  Top Layer w0.127: U4.C4 19.05,27.525 v1(19.4,27.175) ; v1(23.175,29.9) 23.905,29.9 24.125,29.9 25.625,28.4 U3.E1
  MidLayer1 w0.127: v1(19.4,27.175) 20.375,26.2 22.425,26.2 23.175,26.95 v1(23.175,29.9)
ADDR8: U3.E2 U4.D4 | length 27.1
  Top Layer w0.127: U4.D4 v1(18.65,27.15) ; v1(23.75,29.5) 25.275,27.975 v1(39.075,27.975) ; v1@40.351,28.001 U3.E2
  MidLayer1 w0.127: v1(18.65,27.15) 19.975,25.825 22.825,25.825 23.7,26.7 v1@23.7,29.5 ; v1(39.075,27.975) 40.326,27.975 v1(40.352,28.001)
ADDR9: U3.D1 U4.H2 | length 29
  Top Layer w0.127: U4.H2 15.231,29.069 14.075,29.069 13.975,29.169 13.975,30.175 14.225,30.425 34.6,30.425 35.825,29.2 U3.D1
ADDR10: U3.D2 U4.H3 | length 29.1
  Top Layer w0.127: U4.H3 15.267,28.267 13.758,28.267 13.721,28.304 13.721,30.28 14.074,30.633 34.751,30.633 35.784,29.6 38.65,29.6
ADDR11: U3.C1 U4.H4 | length 31.8
  Top Layer w0.127: U4.H4 15.233,27.483 13.767,27.483 13.429,27.821 13.429,30.654 13.662,30.887 35.013,30.887 35.9,30 U3.C1
ADDR12: U3.C2 U4.H5 | length 31.4
  Top Layer w0.127: U4.H5 13.65,26.775 13.175,27.25 13.175,30.759 13.557,31.141 35.213,31.141 36.1,30.254 38.254,30.254
ADDR13: U3.B1 U4.G3 | length 34.2
  Top Layer w0.127: v1(11.9,29.575) 12.046,29.721 12.046,29.989 13.452,31.395 35.318,31.395 35.913,30.8 U3.B1 ; v1(14.525,28.675) 15.625,28.675 U4.G3
  MidLayer1 w0.127: v1@11.975,29.6 11.975,29 12.3,28.675 v1(14.525,28.675)
ADDR14: U3.B2 U4.G4 | length 34.3
  Top Layer w0.127: v1(11.45,29.625) 11.45,29.753 13.346,31.649 35.423,31.649 35.847,31.225 38.9,31.225 ; v1(14.55,27.875) 15.675,27.875 U4.G4
  MidLayer1 w0.127: v1@11.496,29.654 11.496,29.12 12.741,27.875 v1(14.55,27.875)
ADDR15: U3.A1 U4.F3 | length 37.8
  Top Layer w0.127: v1(11.025,29.625) 11.025,29.755 13.179,31.909 19.936,31.909 19.938,31.908 20.262,31.908 20.264,31.909 39.641,31.909 U3.A1 ; v1(16.4,27.9) U4.F3
  MidLayer1 w0.127: v1@11.1,29.65 11.1,28.775 12.725,27.15 15.65,27.15 v1(16.4,27.9)
AGND: R10.2 U1.F6 U1.G6
ALE: R17.2 U3.A4 U3.J4
AREF: P1.6
AVDD: FB1.2 U1.F5 U1.G5
BE23_16: U1.D5 U4.A1 | length 4.6
  Top Layer w0.127: v1(57.536,23.467) U1.D5
  MidLayer1 w0.127: v1@57.387,23.467 v1(57.536,23.467)
  Bottom Layer w0.127: 53.58,23.859 56.995,23.859 v1@57.387,23.467
BE31_24: U1.C4 U4.B2 | length 2.9
  Top Layer w0.127: v1(56.886,23.467) U1.C4
  Bottom Layer w0.127: 54.425,23.467 v1(56.886,23.467)
DAC0_OUT: P4.12
EECLK: R23.2 U6.56 U7.2
EECS: R24.2 U6.1 U7.1
EEDATA: R25.1 U6.55 U7.3
FB_ALE: R17.1 U1.D4 | length 3.9
  Top Layer w0.127: v1(57.536,22.817) U1.D4
  Bottom Layer w0.127: 54.35,22.25 56.969,22.25 v1(57.536,22.817)
FB_CS2: R13.2 U1.B4 | length 2
  Top Layer w0.127: 54.725,23.475 56.228,23.475 U1.B4
FB_OE: R11.2 U1.C9 | length 2.7
  Top Layer w0.127: v1(56.886,26.717) U1.C9
  Bottom Layer w0.127: 54.683,26.717 v1(56.886,26.717)
FB_RW: R12.2 U1.C5 | length 0.5
  Top Layer w0.127: U1.C5 v1(57.536,24.117)
FT_RXD: U6.13
FT_TXD: U6.12
GND: C1.1 C2.1 C3.1 C7.1 C8.2 C12.2 C13.1 C14.2 C15.1 C16.1 C17.1 C18.1 C21.2 C22.1 C23.2 C24.1 C25.1 C26.1 C27.1 C28.1 C29.1 C30.1 C31.1 C32.2 C33.1 C34.1 C35.2 C36.1 C37.1 C38.1 P1.8 P1.17 P3.11 P3.13 P5.3 P5.5 P5.7 P5.9 R10.1 R20.2 R30.1 R31.1 S3.1 SD*1.6 SD*1.10 SD*1.11 SD*1.12 SD*1.13 U1.F7 U1.G3 U1.G7 U1.K10 U1.L6 U2.2 U3.A3 U3.D3 U3.D4 U3.E3 U3.E4 U3.F3 U3.F4 U3.J3 U4.D1 U4.E6 U5.1 U5.11 U5.12 U6.10 U6.21 U6.41 U6.45 U7.5 U7.7 USB1.5 USB2.5 XTAL1.2
JTAG_TCK: P5.4 U1.J6 U6.32
JTAG_TDI: P5.8 U1.H8 U6.33
JTAG_TDO: P5.6 U1.J7 U6.34
JTAG_TMS: P5.2 U1.H9 U6.35
MRF_CS: U5.8
MRF_INT: U5.4
MRF_RESET: U5.2
MRF_SCK: U5.6
MRF_SDI: U5.5
MRF_SDO: U5.7
MRF_WAKE: U5.3
N_RST: C7.2 P5.10 R32.2 S3.2 U1.J11
NetC13_2: C13.2 U2.4
NetC21_1: C21.1 C22.2 IND2.2 U6.9
NetC23_1: C23.1 C24.2 IND3.2 U6.5
NetC33_2: C33.2 U6.3 Y2.2
NetC35_1: C35.1 U6.4 Y2.1
NetC36_2: C36.2 FB2.2 XTAL1.4
NetC37_2: C37.2 R26.1 R27.1 Y1.1
NetC38_2: C38.2 R27.2 R28.1 Y1.2
NetL3_2: L3.2 R31.2
NetL4_1: L4.1 R18.1
NetL5_1: L5.1 R19.1
NetLS1_1: LS1.1 LS1.1A
NetLS1_2: LS1.2 LS1.2A
NetP2_9: P2.9 R1.1
NetR2_2: R2.2 USB1.2
NetR3_2: R3.2 USB1.3
NetR9_2: R9.2 U1.J8
NetR11_1: R11.1 R16.1 U4.A2
NetR12_1: R12.1 R15.1 U4.G5 | length 1.8
  Top Layer w0.127: 14.425,26.4 15.65,26.4 U4.G5
NetR13_1: R13.1 R14.1 U4.B5 | length 0.5
  Top Layer w0.127: U4.B5 v1(20.15,27.15)
NetR20_1: R20.1 U6.6
NetR21_1: R21.1 U6.11
NetR22_2: R22.2 R25.2 U7.4
NetR29_1: R29.1 R30.2 U1.G2
NetR29_2: R29.2 U1.G1
PTA1: P2.10
PTA2: P2.6
PTB2: P4.1
PTB3: P4.3
PTB9: P2.12
PTB10: P4.5
PTB11: P4.7
PTB20: P4.10
PTB23: P2.8
PTC0: P2.5
PTC1: P2.11
PTC2: P2.4
PTC3: P2.2
PTC4: P1.18
PTC5: P2.1
PTC7: P2.3
PTC8: R1.2
PTC9: P2.7
PTC10: P4.11
PTC11: P4.9
PTC12: P1.20
PTC16: P2.16
PTC17: P2.14
PTC18: P2.15
PTC19: P2.13
PTD0: P1.16
PTD1: P1.10
PTD2: P1.14
PTD3: P1.12
PTE0: R8.2 SD*1.8 U1.E4
PTE1: R7.2 SD*1.7 U1.E3
PTE2: SD*1.5 U1.E2
PTE3: R6.2 SD*1.3 U1.F4
PTE4: R5.2 SD*1.2 U1.H7
PTE5: R4.2 SD*1.1 U1.G4
PTE6: SD*1.9 U1.F3
PTE24: P1.2
PTE25: P1.4
PTE26: P1.19
RESET: P3.5
RTCX1: R26.2 U1.L5
RTCX2: R28.2 U1.L4
RXD_LED: L4.2 U6.25
TXD_LED: L5.2 U6.26
USB0D_N: U6.7 USB2.2
USB0D_P: U6.8 USB2.3
USB1_ID: U1.J4 USB1.4
USB1D_N: R2.1 U1.F2
USB1D_P: R3.1 U1.F1
VBUS0: D1.1 USB2.1
VBUS1: D2.1 USB1.1
VCC: D1.2 D2.2 F1.1 P3.15
pads on no net: L1.1 L1.2 L2.1 L2.2 P1.1 P1.5 P1.11 P3.1 P3.2 P3.4 P3.6 P3.8 P3.10 P3.12 P3.14 P3.16 S1.1 S1.2 S1.3 S1.4 S2.1 S2.2 S2.3 S2.4 S4.1 S4.2 U1.A1 U1.A4 U1.A5 U1.A6 U1.A9 U1.A10 U1.A11 U1.B1 U1.B5 U1.B6 U1.B8 U1.B11 U1.C1 U1.C2 U1.C11 U1.D1 U1.D2 U1.D3 U1.D11 U1.E1 U1.E8 U1.E11 U1.F8 U1.F9 U1.F10 U1.F11 U1.G8 U1.G9 U1.G10 U1.G11 U1.H1 U1.H2 U1.H3 U1.H4 U1.H5 U1.H6 U1.H10 U1.H11 U1.J1 U1.J2 U1.J3 U1.J5 U1.J9 U1.J10 U1.K1 U1.K2 U1.K3 U1.K4 U1.K5 U1.K7 U1.K8 U1.K9 U1.K11 U1.L1 U1.L2 U1.L3 U1.L7 U1.L8 U1.L9 U3.A2 U3.A5 U3.B3 U3.B4 U3.H3 U3.H4 U3.J2 U3.J5 U4.E3 U4.H6 U5.9 U6.14 U6.15 U6.17 U6.18 U6.19 U6.20 U6.22 U6.23 U6.24 U6.27 U6.28 U6.29 U6.30 U6.37 U6.38 U6.39 U6.40 U6.42 U6.46 U6.47 U6.48 U6.49 U6.51 U6.52 U6.53 U6.54 U6.57 USB1.0 USB1.6 USB1.7 USB1.8 USB2.0 USB2.4 USB2.6 USB2.7 USB2.8 XTAL1.1
copper on no net:
  other v1: 58.186,22.167 59.486,22.167 60.136,22.167 60.786,22.167 61.436,22.167 58.186,22.817 59.486,22.817 60.136,22.817 60.786,22.817 61.436,22.817 59.486,23.467 60.136,23.467 60.786,23.467 61.436,23.467 59.486,24.767 60.136,24.767 60.786,24.767 61.436,24.767 59.486,25.417 60.136,25.417 60.786,25.417 61.436,25.417 59.486,26.067 60.136,26.067 60.786,26.067 61.436,26.067 59.486,26.717 60.136,26.717 60.786,26.717
  other v2: 171.025,49.175 172.125,49.175 173.225,49.175 174.325,49.175 175.425,49.175 171.025,50.275 172.125,50.275 173.225,50.275 174.325,50.275 175.425,50.275 171.025,51.375 172.125,51.375 173.225,51.375 174.325,51.375 175.425,51.375 171.025,52.475 172.125,52.475 173.225,52.475 174.325,52.475 175.425,52.475 171.025,53.575 172.125,53.575 173.225,53.575 174.325,53.575 175.425,53.575
  other v3: 8.898,-5.07 16.898,-5.07
  other v4: 61.436,26.717

## Polygon pours and split planes (outlines as drawn)
GND on GROUND PLANE (split plane): 80.77,0.51 0.51,0.51 0.51,52.83 80.77,52.83

## Keep-outs
Keep-Out Layer:
  the board outline again, w0.254

## Text inside footprints (layer, text, board x,y; h text height)
U5: Top Overlay "12" at 20.955,50.165 h1.27; Top Overlay "1" at 21.971,47.625 h1.27; Top Overlay "1" at 20.955,47.625 h1.27; Top Overlay "1" at 3.683,47.625 h1.27; Top Overlay "2" at 3.683,50.165 h1.27